# Altium PCB radxa_cm3_io_board_v1330.PcbDoc (part 6 of 8)
Units mil, origin at the board's own origin, x right, y up, seen from the top; angles counter-clockwise.
Board outline 6299.61 x 3544.09 mil, 4 copper layers (Top, GND, Power, Bottom), stack 35.4 mil thick; 547 components, 411 nets, 1952 pads, 2650 vias.
Unrouted connection lines stored in the file: 280.
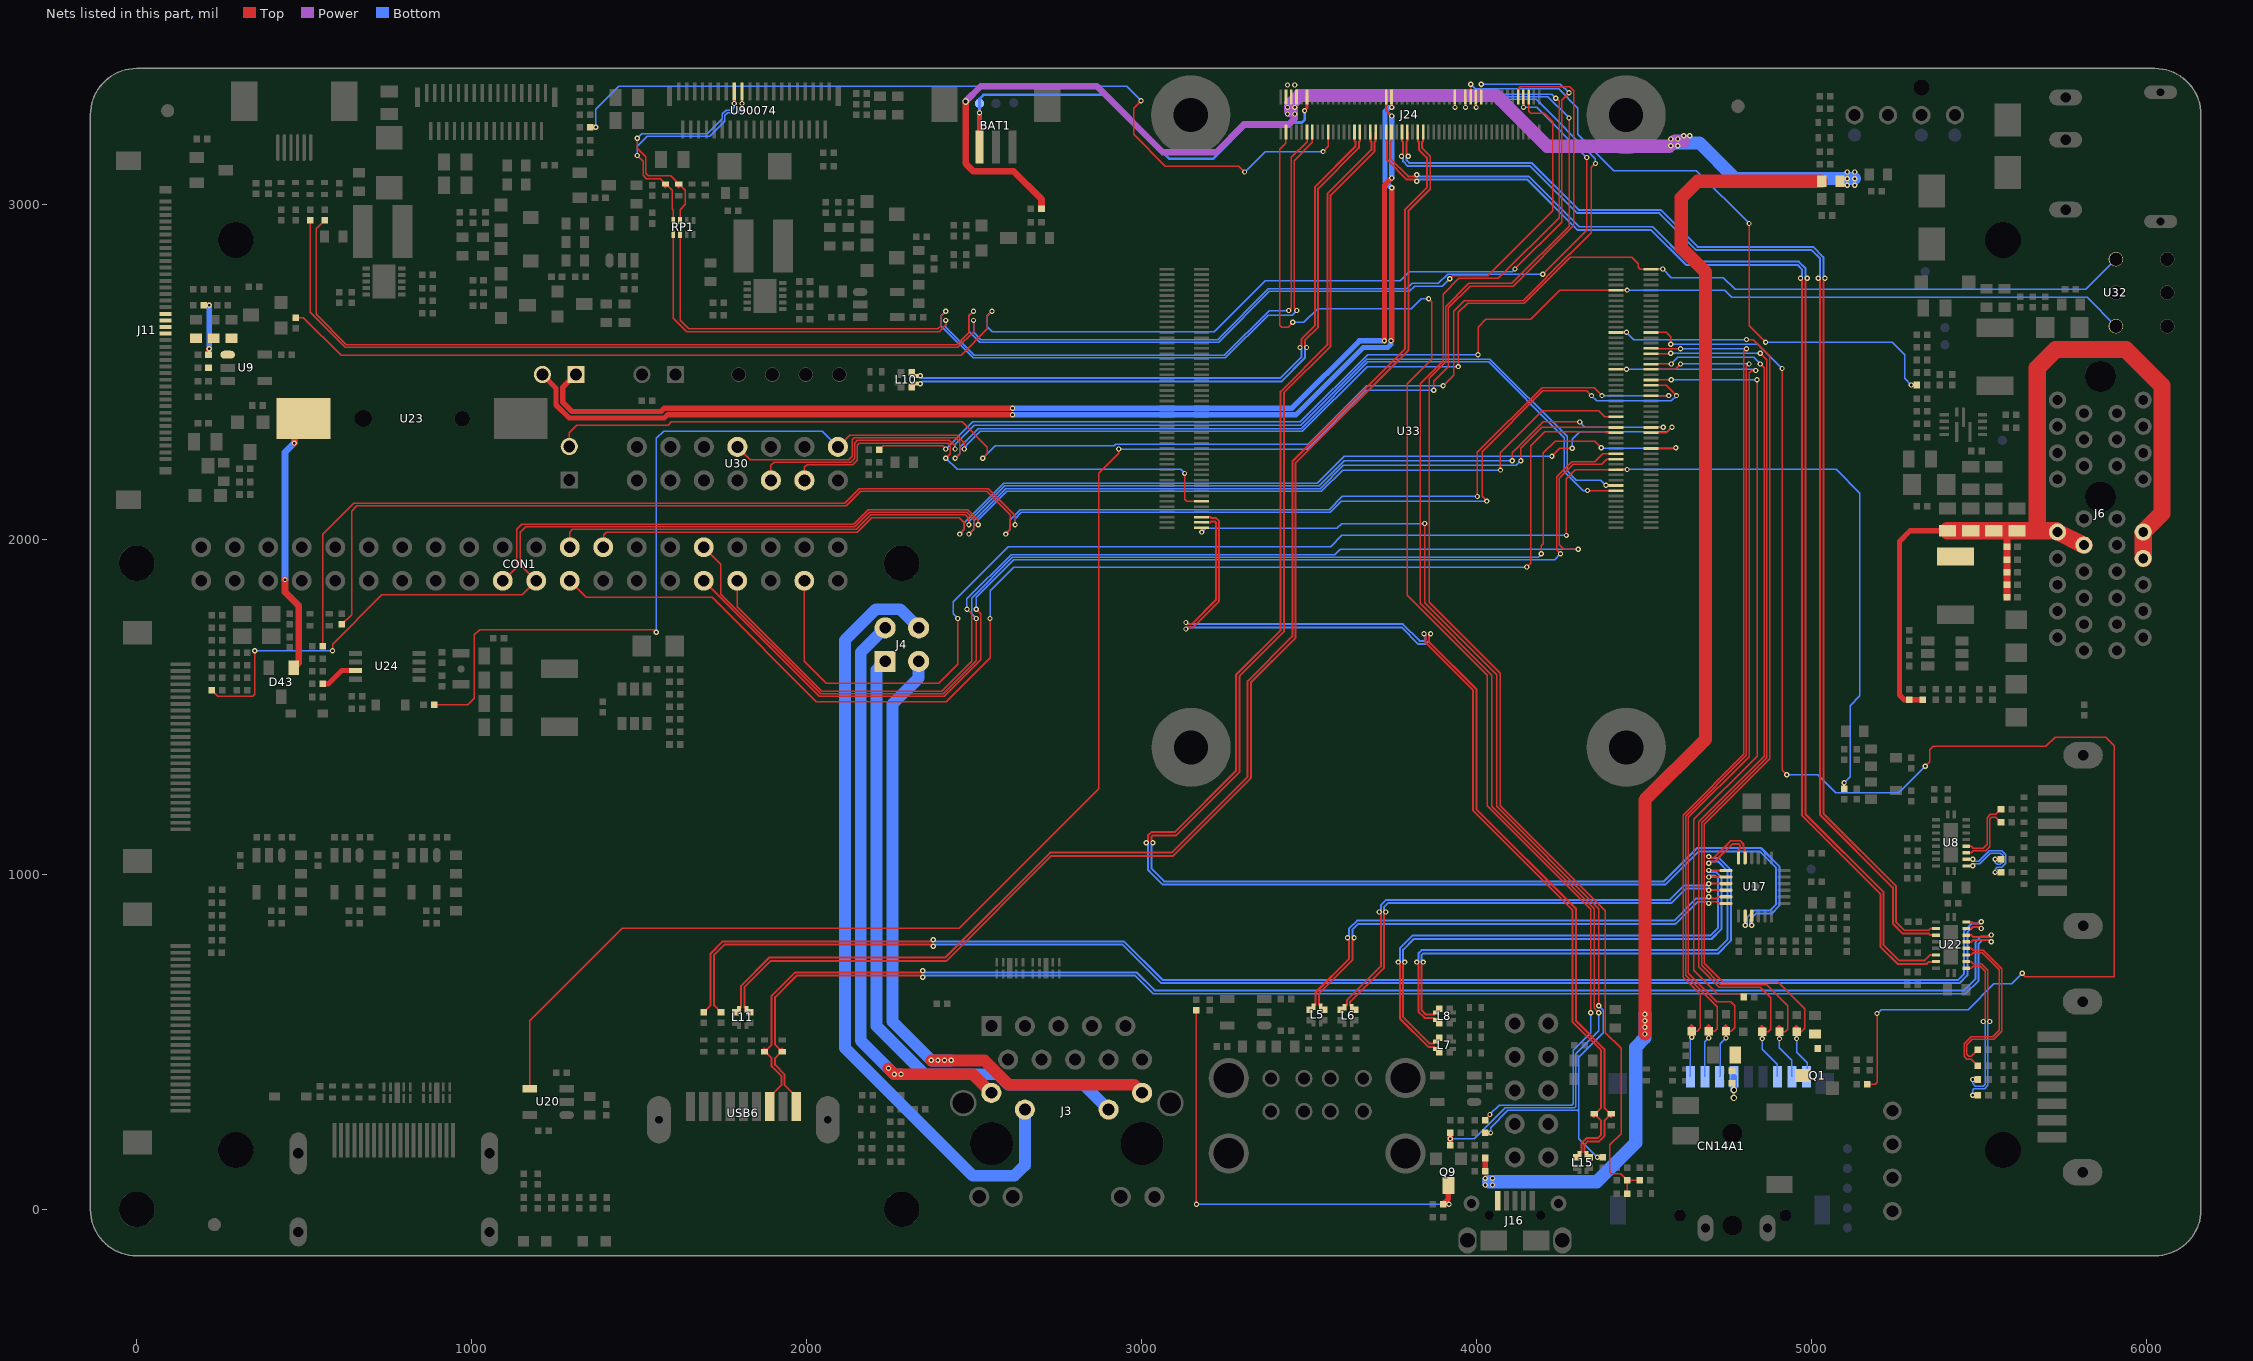
[diagram p8: the nets of this part, all layers, seen from the top]

## Via types
v1: diameter 15.75, hole 7.87, Top to Bottom, 2618 vias
v2: diameter 19.68, hole 11.81, Top to Bottom, 32 vias

## Nets (pads, with @x,y where several pads share a name; then routed paths per layer and width w, separated by ;. In a path a pad name is that pad's centre, name@x,y a point inside that pad or via, vN(x,y) a via of type N, cw(c..) or ccw(c..) an arc to the next point about the centre after c; other vN are vias at no path point) (continued)
PWM3_IR: CON1.37 R215.2 U33.24 | length 4841.3
  Top w3.94: CON1.37@1992.91,1876.38 1992.91,1635.83 2057.87,1570.87 2393.99,1570.87 2450.79,1627.66 v1(2450.79,1763.78) ; v1(4267.72,2011.81) 4267.72,2181.1 4294.69,2208.07 U33.24@4415.75,2208.07 4416.34,2208.66 v1(4448.82,2208.66) ; R215.2@5096.46,1255.91 v1(5096.46,1273.62)
  Bottom w3.94: v1(2450.79,1763.78) 2437.01,1777.56 2437.01,1814.34 2601.01,1978.35 3563.67,1978.35 3597.13,2011.81 v1(4267.72,2011.81) ; v1(4448.82,2208.66) 5072.83,2208.66 5143.7,2137.8 5143.7,1533.46 5114.17,1503.94 5114.17,1291.34 v1(5096.46,1273.62)
PWM11: CON1.32 U33.31 | length 3833.3
  Top w3.94: CON1.32@1692.91,1976.38 1744.09,1925.2 1744.09,1836.9 2041.62,1539.37 2407.04,1539.37 2505.91,1638.24 v1(2505.91,1763.78) ; v1(4192.91,1956.69) 4192.91,1980.31 4198.82,1986.22 4198.82,2257.87 4234.25,2293.31 4352.36,2293.31 v1(4372.05,2273.62) ; U33.31@4520.47,2271.06 4591.93,2271.06 v1(4594.49,2273.62)
  Bottom w3.94: v1(2505.91,1763.78) 2492.13,1777.56 2492.13,1824.92 2614.06,1946.85 4183.07,1946.85 v1(4192.91,1956.69) ; v1(4372.05,2273.62) 4374.02,2271.65 4592.52,2271.65 v1(4594.49,2273.62)
PWRON_KEY: R143.1 U30.14 U32.1 U33.99 | length 6296.6
  Top w3.94: R143.1@887.8,1505.91 988.19,1505.91 1007.87,1525.59 1007.87,1714.57 1023.62,1730.31 1543.31,1730.31 v1(1551.18,1722.44) ; U30.14@2093.31,2275.98 2128.35,2311.02 2448.26,2311.02 2470.47,2288.81 v1(2470.47,2269.68) ; v1(3944.88,2515.75) 3944.88,2677.17 3972.44,2704.72 4141.79,2704.72 4279.59,2842.52 4462.6,2842.52 4482.28,2822.83 4482.28,2812.4 4488.19,2806.5 U33.99@4520.47,2806.5 4521.06,2807.09 v1(4555.12,2807.09)
  Bottom w3.94: v1(1551.18,1722.44) 1551.18,2301.18 1572.83,2322.83 2046.46,2322.83 U30.14@2093.31,2275.98 ; v1(2470.47,2269.68) 2469.42,2270.74 2476.38,2277.7 2476.38,2280.82 2518.39,2322.83 3479.76,2322.83 3672.67,2515.75 v1(3944.88,2515.75) ; v1(4555.12,2807.09) 4580.71,2781.5 4736.22,2781.5 4771.65,2746.06 5817.72,2746.06 U32.1@5907.87,2836.22
RTC_BATTERY: D43.1 TP8.1 U23.1 | length 821.3
  Top w19.68: v1(442.91,1879.92) 442.91,1842.52 484.25,1801.18 484.25,1631.89 D43.1@468.5,1616.14 ; v1(470.47,2287.4) 470.47,2334.65 496.06,2360.24 U23.1@498.11,2360.24
  Bottom w19.68: v1(442.91,1879.92) 442.91,2259.84 v1(470.47,2287.4) TP8.1@470.47,2316.93
RTCIC_32KOUT: R138.1 U24.7 | length 114.8
  Top w15.75: R138.1@555.12,1568.9 555.23,1569.01 572.95,1569.01 612.32,1608.38 U24.7@653.53,1608.38
RUN_PG: R172.2 U32.3 U33.92 | length 3989.9
  Top w3.94: R172.2@2216.54,2267.72 2228.35,2279.53 2405.51,2279.53 v1(2415.35,2269.68) ; v1(4003.94,2551.18) 4003.94,2633.86 4027.56,2657.48 4161.42,2657.48 4247.44,2743.5 U33.92@4415.75,2743.5 4416.34,2744.09 v1(4448.82,2744.09)
  Bottom w3.94: v1(2415.35,2269.68) 2496.06,2350.39 3473.91,2350.39 3674.7,2551.18 v1(4003.94,2551.18) ; v1(4448.82,2744.09) 4740.22,2744.09 4761.87,2722.44 5821.65,2722.44 U32.3@5907.87,2636.22
SARADC_IN3: CON1.26 U33.37 | length 3537
  Top w3.94: CON1.26@1392.91,1976.38 1393.7,1976.38 1393.7,2013.78 1401.57,2021.65 2151.57,2021.65 2194.88,2064.96 2454.72,2064.96 2470.47,2049.21 2470.47,2029.53 v1(2456.69,2015.75) ; v1(4224.41,2248.03) 4248.03,2271.65 v1(4285.43,2271.65) ; U33.37@4520.47,2318.31 4566.34,2318.31 v1(4582.68,2334.65)
  Bottom w3.94: v1(2456.69,2015.75) 2470.47,2029.53 2470.47,2049.89 2587.91,2167.32 3523.62,2167.32 3604.33,2248.03 v1(4224.41,2248.03) ; v1(4285.43,2271.65) 4285.43,2299.21 4307.09,2320.87 4568.9,2320.87 v1(4582.68,2334.65)
SARADC_VIN0_KEY/RECOVERY: J22.2 J24.26 | length 4284.5
  Top w3.94: J22.2@1291.34,2277.17 1291.34,2318.9 1312.99,2340.55 1586.61,2340.55 1596.46,2350.39 2464.57,2350.39 2539.37,2275.59 2539.37,2255.91 v1(2525.59,2242.13) ; v1(3899.61,2458.66) 3931.1,2490.16 3931.1,2681.1 3962.6,2712.6 4138.53,2712.6 4276.32,2850.39 4277.56,2850.39 4342.52,2915.35 4342.52,3110.24 v1(4354.33,3122.05) ; J24.26@3997.44,3320.08 3998.03,3319.49 v1(3998.03,3289.37)
  Bottom w3.94: v1(2525.59,2242.13) 2562.99,2279.53 2918.62,2279.53 2922.56,2283.46 3496.44,2283.46 3671.63,2458.66 v1(3899.61,2458.66) ; v1(3998.03,3289.37) 3998.03,3303.15 4007.87,3312.99 4177.17,3312.99 4354.33,3135.83 v1(4354.33,3122.05)
SARADC_VIN1_HW_ID: J24.28 R153.1 | length 2007.3
  Top w3.94: J24.28@3981.69,3320.08 3981.69,3357.68 v1(3982.28,3358.27) ; v1(4812.99,2942.91) 4812.99,2637.8 v1(4862.2,2588.58) ; v1(5297.24,2460.63) R153.1@5312.99,2460.63
  Bottom w3.94: v1(3982.28,3358.27) 3996.06,3344.49 4244.09,3344.49 4301.18,3287.4 4301.18,3208.66 4409.45,3100.39 4655.51,3100.39 v1(4812.99,2942.91) ; v1(4862.2,2588.58) 5240.16,2588.58 5277.56,2551.18 5277.56,2480.31 v1(5297.24,2460.63)
SARADC_VIN2_HP_HOOK: C35.1 J24.30 R32.1 R33.2 | length 4177.7
  Top w3.94: J24.30@3965.94,3320.08 3966.54,3319.49 v1(3966.54,3289.37) ; v1(4275.59,3257.87) 4275.59,2934.31 4105.06,2763.78 3976.38,2763.78 3907.48,2694.88 3907.48,2529.53 3858.27,2480.31 3858.27,1812.99 4070.87,1600.39 4070.87,1204.72 4383.86,891.73 4383.86,527.56 4431.1,480.31 4431.1,226.38 4397.64,192.91 4397.64,110.24 4401.57,106.3 4429.13,106.3 R33.2@4448.82,86.61 ; C35.1@4448.82,47.24 R33.2@4448.82,86.61 ; R32.1@4486.22,86.61 R33.2@4448.82,86.61
  Bottom w3.94: v1(3966.54,3289.37) 3966.54,3312.99 3974.41,3320.87 4212.6,3320.87 v1(4275.59,3257.87)
SATA1_RXN: C33.1 U8.11 | length 203.4
  Top w3.94: U8.11@5461.02,1025.2 5461.42,1025.59 v1(5480.31,1025.59) ; v1(5547.24,1045.28) C33.1@5564.96,1045.28
  Bottom w3.94: v1(5480.31,1025.59) 5486.22,1031.5 5501.97,1031.5 5533.46,1062.99 5562.99,1062.99 5570.87,1055.12 5570.87,1037.4 5562.99,1029.53 5553.15,1029.53 5547.24,1035.43 v1(5547.24,1045.28)
SATA1_RXP: C34.1 U8.12 | length 230.2
  Top w3.94: U8.12@5461.02,1044.88 5461.42,1045.28 v1(5480.31,1045.28) ; v1(5547.24,1005.91) C34.1@5564.96,1005.91
  Bottom w3.94: v1(5480.31,1045.28) 5486.22,1039.37 5498.03,1039.37 5529.53,1070.87 5566.93,1070.87 5578.74,1059.06 5578.74,1033.46 5566.93,1021.65 5553.15,1021.65 5547.24,1015.75 v1(5547.24,1005.91)
SATA1_TXN: C32.1 U8.13 | length 203.1
  Top w3.94: U8.13@5461.02,1064.57 5461.42,1064.96 5476.38,1064.96 5482.28,1070.87 5519.69,1070.87 5531.5,1082.68 5531.5,1165.35 5537.4,1171.26 5549.21,1171.26 C32.1@5564.96,1155.51
SATA1_TXP: C31.1 U8.14 | length 200.8
  Top w3.94: U8.14@5461.02,1084.25 5461.42,1084.65 5476.38,1084.65 5482.28,1078.74 5511.81,1078.74 5523.62,1090.55 5523.62,1169.29 5533.46,1179.13 5549.21,1179.13 C31.1@5564.96,1194.88
SATA2_RXN: C113.1 U22.11 | length 477.8
  Top w3.94: U22.11@5461.02,720.08 5476.38,720.08 5482.28,725.98 5502.64,725.98 5517.72,710.91 5517.72,566.93 v1(5511.81,561.02) ; v1(5480.31,387.8) C113.1@5496.06,387.8
  Bottom w3.94: v1(5480.31,387.8) 5480.31,375.98 5488.19,368.11 5511.81,368.11 5517.72,374.02 5517.72,555.12 v1(5511.81,561.02)
SATA2_RXP: C114.1 U22.12 | length 506.6
  Top w3.94: U22.12@5461.02,739.76 5476.38,739.76 5482.28,733.86 5505.91,733.86 5525.59,714.17 5525.59,566.93 v1(5531.5,561.02) ; v1(5480.31,340.55) C114.1@5496.06,340.55
  Bottom w3.94: v1(5480.31,340.55) 5480.31,356.3 5484.25,360.24 5515.75,360.24 5525.59,370.08 5525.59,555.12 v1(5531.5,561.02)
SATA2_TXN: C112.1 U22.13 | length 512.8
  Top w3.94: U22.13@5461.02,759.45 5476.38,759.45 5482.28,765.35 5508.55,765.35 5559.06,714.85 5559.06,534.76 5540.05,515.75 5476.38,515.75 5454.72,494.09 5454.72,456.69 5462.6,448.82 5476.38,448.82 C112.1@5496.06,429.13
SATA2_TXP: C110.1 U22.14 | length 511.3
  Top w3.94: U22.14@5461.02,779.13 5476.38,779.13 5482.28,773.23 5511.81,773.23 5566.93,718.11 5566.93,531.5 5543.31,507.87 5479.64,507.87 5462.6,490.83 5462.6,462.6 5468.5,456.69 5476.38,456.69 C110.1@5496.06,476.38
SDMMC0_CLK: R11.1 U33.57 | length 2339.5
  Top w3.94: U33.57@4520.47,2475.79 4521.06,2476.38 v1(4580.71,2476.38) ; R11.1@4797.24,633.86 4787.4,643.7 4718.5,643.7 4647.64,714.57 4647.64,1147.64 4647.64,1164 4836.61,1352.98 v1(4836.61,2476.38)
  Bottom w3.94: v1(4580.71,2476.38) v1(4836.61,2476.38)
SDMMC0_CMD: CN14A1.3 ED13.1 U33.62 | length 2727.4
  Top w3.94: U33.62@4415.75,2507.28 4416.34,2507.87 v1(4446.85,2507.87) ; v1(4744.09,511.81) ED13.1@4744.09,532.09 4759.84,532.09 4769.69,541.93 4769.69,608.27 4757.87,620.08 4716.54,620.08 4631.89,704.72 4631.89,1155.51 4631.89,1170.53 4812.99,1351.63 4812.99,2498.03 4818.9,2503.94 v1(4832.68,2503.94)
  Bottom w3.94: v1(4446.85,2507.87) 4828.74,2507.87 v1(4832.68,2503.94) ; CN14A1.3@4724.41,395.89 4726.38,397.86 4726.38,494.09 v1(4744.09,511.81)
SDMMC0_D0: CN14A1.7 ED11.1 U33.63 | length 2756
  Top w3.94: U33.63@4520.47,2523.03 4521.06,2523.62 v1(4580.71,2523.62) ; v1(4846.46,2523.62) 4858.27,2511.81 4858.27,1352.36 4663.39,1157.48 4663.39,724.41 4724.41,663.39 4846.46,663.39 4877.95,631.89 4877.95,537.99 4870.08,530.12 ED11.1@4852.36,530.12 v1(4852.36,509.84)
  Bottom w3.94: v1(4580.71,2523.62) 4600.39,2543.31 4826.77,2543.31 v1(4846.46,2523.62) ; v1(4852.36,509.84) 4852.36,478.35 4897.64,433.07 CN14A1.7@4897.64,395.89
SDMMC0_D1: CN14A1.8 ED10.1 U33.67 | length 2797.5
  Top w3.94: U33.67@4520.47,2554.53 4578.15,2554.53 v1(4578.74,2555.12) ; v1(4846.46,2555.12) 4866.14,2535.43 4866.14,1348.43 4671.26,1153.54 4671.26,728.35 4728.35,671.26 4865.55,671.26 4928.54,608.27 4928.54,537.4 4921.26,530.12 ED10.1@4903.54,530.12 v1(4903.54,509.84)
  Bottom w3.94: v1(4578.74,2555.12) v1(4846.46,2555.12) ; v1(4903.54,509.84) 4903.54,482.28 4940.94,444.88 CN14A1.8@4940.94,395.89
SDMMC0_D2/ARMJTAG_TCK: CN14A1.1 ED15.1 U33.69 | length 2579.3
  Top w3.94: U33.69@4520.47,2570.28 4521.06,2568.9 v1(4608.27,2568.9) ; v1(4641.73,513.78) ED15.1@4641.73,532.09 4657.48,532.09 4667.03,541.63 4667.03,642.03 4616.14,692.91 4616.14,1163.39 4616.14,1177.05 4797.24,1358.15 4797.24,2561.02 v1(4805.12,2568.9)
  Bottom w3.94: v1(4608.27,2568.9) v1(4805.12,2568.9) ; CN14A1.1@4637.8,395.89 4637.79,509.84 v1(4641.73,513.78)
SDMMC0_D3/ARMJTAG_TMS: CN14A1.2 ED14.1 U33.61 | length 2570.3
  Top w3.94: U33.61@4520.47,2507.28 4591.93,2507.28 v1(4608.27,2523.62) ; v1(4692.91,511.81) ED14.1@4692.91,532.09 4710.63,532.09 4718.5,539.96 4718.5,604.33 4624.02,698.82 4624.02,1159.45 4624.02,1173.79 4805.12,1354.89 4805.12,2515.75 v1(4812.99,2523.62)
  Bottom w3.94: v1(4608.27,2523.62) v1(4812.99,2523.62) ; CN14A1.2@4681.1,395.89 4681.1,500 v1(4692.91,511.81)
SDMMC0_DET_L: CN14A1.9 ED9.1 U33.76 | length 2973.3
  Top w3.94: U33.76@4415.75,2617.52 4416.34,2618.11 v1(4446.85,2618.11) ; v1(4805.12,2596.46) 4824.8,2596.46 4874.02,2547.24 4874.02,1344.49 4679.13,1149.61 4679.13,734.25 4734.25,679.13 4899.02,679.13 4979.72,598.43 4979.72,541.34 4968.5,530.12 ED9.1@4954.72,530.12 v1(4954.72,509.84)
  Bottom w3.94: v1(4446.85,2618.11) 4468.5,2596.46 v1(4805.12,2596.46) ; v1(4954.72,509.84) 4954.72,468.5 4986.22,437.01 4986.22,397.86 CN14A1.9@4984.25,395.89
SDMMC_PWREN: R13.2 U33.75 | length 4454.9
  Top w3.94: U33.75@4520.47,2617.52 4565.55,2617.52 4578.74,2604.33 v1(4578.74,2582.68) ; v1(4911.42,2509.84) 4911.42,1311.02 v1(4925.2,1297.24) ; R13.2@5165.35,374.02 5188.98,374.02 5194.88,379.92 v1(5194.88,584.65) ; v1(5338.58,1322.83) 5352.36,1336.61 5352.36,1372.05 5362.2,1381.89 5698.82,1381.89 5726.38,1409.45 5877.95,1409.45 5903.54,1383.86 5903.54,694.88 5637.8,694.88 v1(5627.95,704.72)
  Bottom w3.94: v1(4578.74,2582.68) 4838.58,2582.68 v1(4911.42,2509.84) ; v1(4925.2,1297.24) 5017.72,1297.24 5070.87,1244.09 5259.84,1244.09 v1(5338.58,1322.83) ; v1(5194.88,584.65) 5206.69,596.46 5466.54,596.46 5543.31,673.23 5596.46,673.23 v1(5627.95,704.72)
SPI0_CSO_MO: CON1.33 U33.28 | length 3450.6
  Top w3.94: CON1.33@1792.91,1876.38 1792.91,1799.21 2044.88,1547.24 2403.78,1547.24 2492.13,1635.59 2492.13,1777.56 v1(2478.35,1791.34) ; v1(4303.15,1970.47) 4259.84,1970.47 4246.06,1984.25 4246.06,2183.07 4287.4,2224.41 4372.64,2224.41 4387.8,2239.57 U33.28@4415.75,2239.57
  Bottom w3.94: v1(2478.35,1791.34) 2478.35,1822.27 2610.8,1954.72 3576.77,1954.72 3592.52,1970.47 v1(4303.15,1970.47)
SPI0_MISO_MO: CON1.31 U33.30 | length 3446
  Top w3.94: CON1.31@1692.91,1876.38 2037.8,1531.5 2410.3,1531.5 2519.69,1640.88 2519.69,1777.56 v1(2505.91,1791.34) ; v1(4250,1956.69) 4238.19,1968.5 4238.19,2187.01 4283.46,2232.28 4352.36,2232.28 4375.39,2255.31 U33.30@4415.75,2255.31
  Bottom w3.94: v1(2505.91,1791.34) 2505.91,1827.56 2617.32,1938.98 4232.28,1938.98 v1(4250,1956.69)
SPI3_CLK_M0: CON1.23 U33.38 | length 3929.4
  Top w3.94: CON1.23@1292.91,1876.38 1342.52,1826.77 1717.71,1826.77 2028.74,1515.75 2416.82,1515.75 2547.24,1646.17 v1(2547.24,1763.78) ; v1(4149.61,1917.32) 4161.42,1929.13 4161.42,2279.53 4202.76,2320.87 4383.27,2320.87 4385.83,2318.31 U33.38@4415.75,2318.31
  Bottom w3.94: v1(2547.24,1763.78) 2547.24,1846.63 2617.94,1917.32 v1(4149.61,1917.32)
SPI3_CSO_M0: CON1.24 U33.39 | length 3543.9
  Top w3.94: CON1.24@1292.91,1976.38 1292.91,2021.65 1300.79,2029.53 2147.64,2029.53 2190.94,2072.83 2473.79,2072.83 2484.25,2062.37 v1(2484.25,2043.31) ; v1(4106.3,2234.25) 4106.3,2257.87 4198.82,2350.39 v1(4307.09,2350.39) ; U33.39@4520.47,2334.06 4521.06,2334.65 v1(4557.09,2334.65)
  Bottom w3.94: v1(2484.25,2043.31) 2484.25,2052.53 2591.17,2159.45 3529.53,2159.45 3604.33,2234.25 v1(4106.3,2234.25) ; v1(4307.09,2350.39) 4322.83,2334.65 v1(4557.09,2334.65)
SPI3_MISO_M0: CON1.21 R79.2 U33.40 | length 4906.7
  Top w3.94: R79.2@224.41,1549.21 242.13,1531.5 346.46,1531.5 352.36,1537.4 v1(352.36,1667.32) ; v1(584.65,1667.32) 584.65,1687.01 732.28,1834.65 1151.18,1834.65 CON1.21@1192.91,1876.38 1145.67,1923.62 1145.67,2021.65 1161.42,2037.4 2143.47,2037.4 2186.78,2080.71 2477.05,2080.71 2498.03,2059.73 2498.03,2029.53 v1(2484.25,2015.75) ; v1(4131.89,2234.25) 4131.89,2271.65 4194.29,2334.06 U33.40@4415.75,2334.06
  Bottom w3.94: v1(352.36,1667.32) v1(584.65,1667.32) ; v1(2484.25,2015.75) 2498.03,2029.53 2498.03,2055.18 2594.43,2151.57 3533.08,2151.57 3601.98,2220.47 4118.11,2220.47 v1(4131.89,2234.25)
SPI3_MOSI_M0: CON1.19 U33.44 | length 3690.8
  Top w3.94: CON1.19@1092.91,1876.38 1133.86,1917.32 1133.86,2029.53 1149.61,2045.28 2140.21,2045.28 2183.51,2088.58 2480.31,2088.58 2511.81,2057.09 v1(2511.81,2043.31) ; v1(4070.87,2206.69) 4070.87,2257.87 4076.77,2263.78 4076.77,2264.4 4196.23,2383.86 4363.58,2383.86 4381.89,2365.55 U33.44@4415.75,2365.55
  Bottom w3.94: v1(2511.81,2043.31) 2511.81,2057.82 2597.69,2143.7 3536.34,2143.7 3599.33,2206.69 v1(4070.87,2206.69)
SPKN_OUT: J9.2 J24.58 | length 3467.8
  Top w7.87: J24.58@3745.47,3320.08 3746.06,3319.49 v1(3746.06,3289.37)
  Top w15.75: J9.2@1211.02,2492.13 1251.97,2451.18 1251.97,2401.57 1291.34,2362.2 1574.8,2362.2 1584.65,2372.05 v1(2614.17,2372.05) ; v1(3744.09,2592.52) 3746.06,2592.52 v1(3746.06,3049.21)
  Bottom w15.75: v1(2614.17,2372.05) 3460.63,2372.05 3661.42,2572.83 3734.25,2572.83 3744.09,2582.68 v1(3744.09,2592.52) ; v1(3746.06,3049.21) 3726.38,3068.9 3726.38,3277.56 3738.19,3289.37 v1(3746.06,3289.37)
SPKP_OUT: J9.1 J24.60 | length 3393.9
  Top w7.87: J24.60@3729.72,3320.08 3729.72,3279.53 3730.31,3279.53 v1(3746.06,3263.78)
  Top w15.75: J9.1@1311.02,2492.13 1271.65,2452.76 1271.65,2409.73 1299.49,2381.89 1564.96,2381.89 1574.8,2391.73 v1(2614.17,2391.73) ; v1(3724.41,2592.52) 3724.41,3057.09 v1(3746.06,3078.74)
  Bottom w15.75: v1(2614.17,2391.73) 3448.82,2391.73 3649.61,2592.52 v1(3724.41,2592.52) ; v1(3746.06,3078.74) v1(3746.06,3263.78)
SYNC_IN: U30.8 U33.16 | length 3116.6
  Top w3.94: U30.8@1793.31,2275.98 1831.1,2238.19 2125.98,2238.19 2135.83,2248.03 2135.83,2297.24 2141.73,2303.15 2445,2303.15 2456.69,2291.45 2456.69,2255.91 v1(2442.91,2242.13) ; v1(4330.71,2145.67) 4415.16,2145.67 U33.16@4415.75,2145.08
  Bottom w3.94: v1(2442.91,2242.13) 2456.69,2255.91 2456.69,2275.39 2512.01,2330.71 3476.49,2330.71 3675.31,2529.53 4035.38,2529.53 4261.81,2303.09 4261.81,2201.66 4317.8,2145.67 v1(4330.71,2145.67)
SYNC_OUT: U30.9 U33.18 | length 2974.4
  Top w3.94: U30.9@1893.31,2175.98 1893.31,2220.47 1903.15,2230.31 2131.89,2230.31 2143.7,2242.13 2143.7,2287.4 2151.57,2295.28 2425.2,2295.28 2442.91,2277.56 v1(2442.91,2269.68) ; v1(4385.83,2161.42) 4415.16,2161.42 U33.18@4415.75,2160.83
  Bottom w3.94: v1(2442.91,2269.68) 2442.91,2283.46 2500,2340.55 3475.2,2340.55 3672.05,2537.4 4039.37,2537.4 4269.69,2307.09 4269.69,2204.92 4297.44,2177.17 4370.08,2177.17 v1(4385.83,2161.42)
TP_DET_1: J24.81 R66.1 | length 2554.3
  Top w3.94: R66.1@1354.33,3230.31 v1(1370.08,3230.31) ; v1(2998.03,3309.06) 2976.38,3287.4 2976.38,3208.66 3070.87,3114.17 3289.37,3114.17 v1(3307.09,3096.46) ; v1(3541.34,3157.48) 3556.5,3172.64 J24.81@3556.5,3216.14
  Bottom w3.94: v1(1370.08,3230.31) 1370.08,3283.46 1438.98,3352.36 2954.72,3352.36 v1(2998.03,3309.06) ; v1(3307.09,3096.46) 3368.11,3157.48 v1(3541.34,3157.48)
TP_INT_1: J24.87 RP1.7 | length 2868.8
  Top w3.94: RP1.7@1621.89,2910.6 1621.89,2653.7 1647.64,2627.95 2391.79,2627.95 2401.57,2637.74 2401.57,2667.32 v1(2415.35,2681.1) ; v1(3462.6,2683.07) 3454.72,2690.94 3454.72,3130.51 3509.25,3185.04 J24.87@3509.25,3216.14
  Bottom w3.94: v1(2415.35,2681.1) 2401.57,2667.32 2401.57,2636.44 2496.68,2541.34 3249.38,2541.34 3377.34,2669.29 3448.82,2669.29 v1(3462.6,2683.07)
TP_INT_L: J24.8 R46.1 | length 4861.2
  Top w3.94: R46.1@517.72,2952.76 517.72,2677.17 622.05,2572.83 2450.9,2572.83 2498.03,2619.96 v1(2498.03,2653.54) ; J24.8@4139.17,3320.08 4139.76,3319.49 v1(4139.76,3289.37) ; v1(4196.85,2791.34) 4328.74,2923.23 v1(4328.74,3139.76)
  Bottom w3.94: v1(2498.03,2653.54) 2498.03,2617.94 2519.51,2596.46 3226.55,2596.46 3378.13,2748.03 3791.34,2748.03 3807.09,2763.78 3885.83,2763.78 3913.39,2791.34 v1(4196.85,2791.34) ; v1(4139.76,3289.37) 4179.13,3289.37 v1(4328.74,3139.76)
TP_INT_LCD: D15.1 RP1.2 U90074.25 | length 733.6
  Top w3.94: v1(1494.09,3196.85) 1494.09,3167.32 1519.69,3141.73 1519.69,3092.52 1527.56,3084.65 1594.49,3084.65 D15.1@1618.11,3061.02 1637.8,3041.34 1637.8,3000 1622.05,2984.25 1622.05,2951.76 RP1.2@1621.89,2951.6 ; v1(1783.46,3301.18) U90074.25@1783.46,3336.61
  Bottom w3.94: v1(1494.09,3196.85) 1507.87,3210.63 1702.76,3210.63 1748.03,3255.91 1748.03,3269.68 1759.84,3281.5 1775.59,3281.5 1783.46,3289.37 v1(1783.46,3301.18)
TP_PWR_DET: J24.24 R51.2 | length 4816.4
  Top w3.94: R51.2@474.41,2661.42 498.03,2661.42 610.24,2549.21 2460.69,2549.21 2539.37,2627.89 2539.37,2667.32 v1(2553.15,2681.1) ; J24.24@4013.19,3320.08 4013.19,3357.68 v1(4013.78,3358.27) ; v1(4114.17,2807.09) 4253.94,2946.85 4253.94,3311.02 v1(4275.59,3332.68)
  Bottom w3.94: v1(2553.15,2681.1) 2539.37,2667.32 2539.37,2635.15 2554.44,2620.08 3216.77,2620.08 3368.34,2771.65 3771.65,2771.65 3799.21,2799.21 4106.3,2799.21 v1(4114.17,2807.09) ; v1(4013.78,3358.27) 4250,3358.27 v1(4275.59,3332.68)
TP_RST_1: J24.89 RP1.8 | length 2791.7
  Top w3.94: RP1.8@1601.89,2910.6 1601.89,2659.92 1641.73,2620.08 2395.05,2620.08 2415.35,2640.38 v1(2415.35,2653.54) ; v1(3438.98,2683.07) 3446.85,2690.94 3446.85,3140.35 3493.5,3187.01 J24.89@3493.5,3216.14
  Bottom w3.94: v1(2415.35,2653.54) 2415.35,2633.8 2499.94,2549.21 3246.12,2549.21 3379.98,2683.07 v1(3438.98,2683.07)
TP_RST_L: J24.6 R45.1 | length 4739.7
  Top w3.94: R45.1@561.02,2952.76 535.43,2927.17 535.43,2671.26 625.98,2580.71 2447.64,2580.71 2484.25,2617.32 2484.25,2667.32 v1(2498.03,2681.1) ; v1(3919.29,2777.56) 3929.13,2787.4 4033.41,2787.4 4226.38,2980.37 4226.38,3246.74 4201.46,3271.65 4161.42,3271.65 4154.92,3278.15 J24.6@4154.92,3320.08
  Bottom w3.94: v1(2498.03,2681.1) 2484.25,2667.32 2484.25,2620.58 2516.25,2588.58 3229.81,2588.58 3381.39,2740.16 3799.21,2740.16 3814.96,2755.91 3897.64,2755.91 v1(3919.29,2777.56)
TP_RST_LCD: D16.1 RP1.1 U90074.23 | length 710.8
  Top w3.94: v1(1494.09,3145.67) 1511.81,3127.95 1511.81,3086.61 1521.65,3076.77 1562.99,3076.77 D16.1@1578.74,3061.02 1598.43,3041.34 1598.43,2986.22 1602.36,2982.28 1602.36,2952.07 RP1.1@1601.89,2951.6 ; v1(1807.09,3301.18) U90074.23@1807.09,3336.61
  Bottom w3.94: v1(1494.09,3145.67) 1494.09,3173.23 1523.62,3202.76 1710.63,3202.76 1755.91,3248.03 1755.91,3265.75 1763.78,3273.62 1793.31,3273.62 1807.09,3287.4 v1(1807.09,3301.18)
TR0: J3.11 J4.2 | length 1761.1
  Top w35.43: v1(2244.09,421.26) v1(2261.81,403.54) 2495.67,403.54 J3.11@2551.18,348.03
  Bottom w35.43: J4.2@2234.25,1735.83 2161.42,1662.99 2161.42,503.94 v1(2244.09,421.26) v1(2261.81,403.54) v1(2281.5,403.54)
TR1: J3.12 J4.1 | length 2372.5
  Bottom w35.43: J4.1@2334.25,1735.83 2278.74,1791.34 2206.69,1791.34 2114.17,1698.82 2114.17,482.28 2496.06,100.39 2620.08,100.39 2651.18,131.5 J3.12@2651.18,298.03
TR2: J3.13 J4.4 | length 1894.9
  Bottom w35.43: J4.4@2234.25,1635.83 2208.66,1610.24 2208.66,547.24 2352.36,403.54 2570.28,403.54 2601.77,372.05 2827.17,372.05 J3.13@2901.18,298.03
TR3: J3.14 J4.3 | length 1999.8
  Top w35.43: v1(2372.05,444.88) v1(2391.73,444.88) v1(2411.42,444.88) v1(2431.1,444.88) 2530.49,444.88 2603.33,372.05 2977.17,372.05 J3.14@3001.18,348.03
  Bottom w35.43: J4.3@2334.25,1635.83 2334.25,1586.22 2255.91,1507.87 2255.91,561.02 v1(2372.05,444.88) v1(2411.42,444.88) v1(2431.1,444.88)
TS: BAT1.3 J24.90 P2.1 | length 1317.4
  Top w7.87: v1(3486.22,3279.53) 3486.22,3280.12 3493.5,3287.4 J24.90@3493.5,3320.08
  Top w15.75: BAT1.3@2515.75,3171.26 v1(2515.75,3273.62)
  Bottom w7.87: v1(2515.75,3273.62) P2.1@2515.75,3301.18 2515.75,3314.96 2527.56,3326.77 2891.73,3326.77 3082.68,3135.83 3212.6,3135.83 3320.87,3244.09 3478.35,3244.09 3486.22,3251.97 v1(3486.22,3279.53)
TV_OUT: U30.11 U33.111 | length 1439.9
  Top w3.94: U30.11@1993.31,2175.98 1993.31,2214.57 2001.18,2222.44 2137.8,2222.44 2151.57,2236.22 2151.57,2281.5 2157.48,2287.4 2421.94,2287.4 2429.13,2280.2 2429.13,2255.91 v1(2415.35,2242.13) ; v1(3127.95,2196.85) 3127.95,2120.08 3134.45,2113.58 U33.111@3179.13,2113.58
  Bottom w3.94: v1(2415.35,2242.13) 2448.82,2208.66 3116.14,2208.66 v1(3127.95,2196.85)
UART2_RX: R168.2 U33.51 | length 4750.7
  Top w3.94: R168.2@612.2,1746.06 641.73,1775.59 641.73,2084.65 657.48,2100.39 2117.38,2100.39 2160.68,2143.7 2538.14,2143.7 2608.27,2073.57 2608.27,2029.53 v1(2594.49,2015.75) ; v1(4001.97,2127.95) 4001.97,2259.84 4194.88,2452.76 4350.39,2452.76 v1(4374.02,2429.13) ; U33.51@4520.47,2428.54 4521.06,2429.13 v1(4572.83,2429.13)
  Bottom w3.94: v1(2594.49,2015.75) 2608.27,2029.53 2608.27,2059.11 2637.74,2088.58 3559.17,2088.58 3598.54,2127.95 v1(4001.97,2127.95) ; v1(4374.02,2429.13) v1(4572.83,2429.13)
UART2_TX: R167.2 U33.55 | length 4883.1
  Top w3.94: R167.2@555.12,1681.1 555.12,2015.75 647.64,2108.27 2114.12,2108.27 2157.42,2151.57 2541.4,2151.57 2622.05,2070.92 v1(2622.05,2043.31) ; v1(4029.53,2114.17) 4015.75,2127.95 4015.75,2261.81 4196.85,2442.91 4328.74,2442.91 v1(4342.52,2429.13) ; U33.55@4520.47,2460.04 4565.55,2460.04 v1(4596.46,2429.13)
  Bottom w3.94: v1(2622.05,2043.31) 2622.05,2061.76 2641,2080.71 3562.43,2080.71 3595.9,2114.17 v1(4029.53,2114.17) ; v1(4342.52,2429.13) 4358.27,2413.39 4580.71,2413.39 v1(4596.46,2429.13)
USB1_DM: L5.4 R111.1 U17.11 | length 1463.8
  Top w3.94: R111.1@3501.97,596.46 3510.83,605.32 L5.4@3512.79,605.32
  Top w5.91: L5.4@3512.79,605.32 3518.7,611.23 3518.7,647.42 3619.09,747.82 3619.09,806.1 v1(3614.17,811.02) ; v1(4692.91,933.07) 4698.82,928.15 4715.55,928.15 4720.47,933.07 U17.11@4744.09,933.07
  Bottom w5.91: v1(3614.17,811.02) 3619.09,815.94 3619.09,838.58 3642.72,862.2 4589.5,862.2 4655.44,928.15 4687.99,928.15 v1(4692.91,933.07)
USB1_DP: L5.2 R109.1 U17.12 | length 1447.5
  Top w3.94: L5.2@3534.45,605.32 3536.41,605.32 R109.1@3545.28,596.46
  Top w5.91: L5.2@3534.45,605.32 3528.54,611.23 3528.54,643.35 3628.94,743.74 3628.94,806.1 v1(3633.86,811.02) ; v1(4692.91,913.39) 4698.82,918.31 4715.55,918.31 4720.47,913.39 U17.12@4744.09,913.39
  Bottom w5.91: v1(3633.86,811.02) 3628.94,815.94 3628.94,834.51 3646.79,852.36 4593.57,852.36 4659.52,918.31 4687.99,918.31 v1(4692.91,913.39)
USB2.0_HUB_PWR: J24.34 R107.2 R108.1 | length 4327.8
  Top w3.94: J24.34@3934.45,3320.08 3934.45,3288.78 v1(3935.04,3289.37) ; v1(4236.22,3316.93) 4246.06,3307.09 4246.06,2960.63 4064.96,2779.53 3946.85,2779.53 3899.61,2732.28 3899.61,2533.46 3830.71,2464.57 3830.71,1809.06 4045.28,1594.49 4045.28,1202.76 4350.39,897.64 4350.39,600.39 v1(4364.17,586.61)
  Top w15.75: R107.2@3921.26,190.94 v1(3921.26,210.63) R108.1@3921.26,228.35
  Bottom w3.94: v1(3921.26,210.63) 3992.13,210.63 4084.65,303.15 4291.34,303.15 4295.28,307.09 4295.28,464.57 4364.17,533.46 v1(4364.17,586.61) ; v1(3935.04,3289.37) 3935.04,3318.9 3944.88,3328.74 4224.41,3328.74 v1(4236.22,3316.93)
USB2_DM: L6.4 R112.1 U17.9 | length 1424.2
  Top w3.94: R112.1@3594.49,596.46 3601.38,603.35 L6.4@3605.31,603.35
  Top w5.91: L6.4@3605.31,603.35 3612.2,610.24 3612.2,624.02 3713.58,725.39 3713.58,882.87 v1(3708.66,887.8) ; v1(4692.91,972.44) U17.9@4744.09,972.44
  Bottom w5.91: v1(3708.66,887.8) 3713.58,892.72 3713.58,907.48 3730.31,924.21 4576.7,924.21 4620.01,967.52 4687.99,967.52 v1(4692.91,972.44)
USB2_DP: L6.2 R110.1 U17.10 | length 1407
  Top w3.94: L6.2@3626.97,603.35 3633.87,596.46 R110.1@3637.8,596.46
  Top w5.91: L6.2@3626.97,603.35 3622.05,608.27 3622.05,619.94 3723.43,721.32 3723.43,882.87 v1(3728.35,887.8) ; v1(4692.91,952.76) U17.10@4744.09,952.76
  Bottom w5.91: v1(3728.35,887.8) 3723.43,892.72 3723.43,903.4 3734.39,914.37 4580.78,914.37 4624.09,957.68 4687.99,957.68 v1(4692.91,952.76)
USB2_HOST2_DM: J24.65 U17.14 | length 4744.4
  Top w5.91: v1(3013.78,1094.49) 3018.7,1099.41 3018.7,1116.14 3028.54,1125.98 3098.43,1125.98 3281.5,1309.06 3281.5,1595.47 3414.37,1728.35 3414.37,2441.01 3554.13,2580.78 3554.13,3031.57 3685.43,3162.87 3685.43,3186.02 3682.48,3188.98 J24.65@3682.48,3216.14 ; v1(4801.18,848.43) U17.14@4801.18,875.98
  Bottom w5.91: v1(3013.78,1094.49) 3018.7,1089.57 3018.7,1013.71 3031.43,1000.98 3062.92,969.49 4563.06,969.49 4662.47,1068.9 4844.35,1068.9 4893.7,1019.55 4893.7,910.57 4875.84,892.72 4828.74,892.72 4806.1,870.08 4806.1,853.35 v1(4801.18,848.43)
USB2_HOST2_DP: J24.63 U17.15 | length 4744.4
  Top w5.91: v1(3033.46,1094.49) 3028.54,1099.41 3028.54,1112.06 3032.62,1116.14 3102.5,1116.14 3291.34,1304.98 3291.34,1591.4 3424.21,1724.27 3424.21,2436.94 3563.98,2576.7 3563.98,3027.49 3695.28,3158.79 3695.28,3186.02 3698.23,3188.98 J24.63@3698.23,3216.14 ; v1(4820.87,848.43) U17.15@4820.87,875.98
  Bottom w5.91: v1(3033.46,1094.49) 3028.54,1089.57 3028.54,1017.79 3067,979.33 4558.99,979.33 4658.39,1078.74 4848.43,1078.74 4903.54,1023.62 4903.54,906.5 4879.92,882.87 4832.82,882.87 4815.94,866 4815.94,853.35 v1(4820.87,848.43)
USB2_HOST3_DM: J24.71 L10.4 R126.1 | length 1942.5
  Top w5.91: R126.1@2312.99,2498.03 2321.85,2489.17 L10.4@2321.85,2487.21 2322.84,2488.19 v1(2338.58,2488.19) ; v1(3472.44,2572.83) 3477.36,2577.76 3477.36,2598.43 3516.73,2637.8 3516.73,3051.25 3638.19,3172.71 3638.19,3186.02 3635.24,3188.98 J24.71@3635.24,3216.14
  Bottom w5.91: v1(2338.58,2488.19) 2345.47,2481.3 3413.25,2481.3 3477.36,2545.42 3477.36,2567.91 v1(3472.44,2572.83)
USB2_HOST3_DP: J24.69 L10.2 R124.1 | length 1958.8
  Top w5.91: R124.1@2312.99,2454.72 2312.99,2456.69 L10.2@2321.85,2465.55 2337.6,2465.55 v1(2338.58,2464.57) ; v1(3492.13,2572.83) 3487.2,2577.76 3487.2,2594.35 3526.57,2633.72 3526.57,3047.17 3648.03,3168.63 3648.03,3186.02 3650.98,3188.98 J24.69@3650.98,3216.14
  Bottom w5.91: v1(2338.58,2464.57) 2345.47,2471.46 3417.32,2471.46 3487.2,2541.34 3487.2,2567.91 v1(3492.13,2572.83)
USB3_DM: L7.2 R116.1 U17.7 | length 1580.7
  Top w3.94: L7.2@3878.93,500.99 3877.95,501.97 R116.1@3887.8,511.81
  Top w5.91: v1(3785.43,738.19) 3780.51,733.27 3780.51,573.96 3859.39,495.08 3871.06,495.08 L7.2@3877.95,501.97 ; v1(4692.91,1011.81) U17.7@4744.09,1011.81
  Bottom w5.91: v1(3785.43,738.19) 3780.51,743.11 3780.51,775.45 3812.15,807.09 4700.79,807.09 4730.31,836.61 4730.31,991.14 4714.57,1006.89 4697.83,1006.89 v1(4692.91,1011.81)
USB3_DP: L7.4 R121.1 U17.8 | length 1580.4
  Top w3.94: L7.4@3878.93,479.33 3887.8,470.47 R121.1@3887.8,468.5
  Top w5.91: v1(3765.75,738.19) 3770.67,733.27 3770.67,569.88 3855.31,485.24 3873.02,485.24 L7.4@3878.93,479.33 ; v1(4692.91,992.13) U17.8@4744.09,992.13
  Bottom w5.91: v1(3765.75,738.19) 3770.67,743.11 3770.67,779.53 3808.07,816.93 4696.71,816.93 4720.47,840.69 4720.47,987.06 4710.49,997.05 4697.83,997.05 v1(4692.91,992.13)
USB3_HOST1_DM: J24.47 L11.1 R128.2 | length 4014.9
  Top w3.94: R128.2@1787.4,588.58 1789.36,588.58 L11.1@1798.23,597.44
  Top w5.91: L11.1@1798.23,597.44 1804.13,603.35 1804.13,667.32 1888.78,751.97 2413.39,751.97 2726.38,1064.96 3089.43,1064.96 3315.94,1291.48 3315.94,1576.77 3449.8,1710.63 3449.8,2232.42 3786.42,2569.04 3786.42,2984.94 3851.38,3049.9 3851.38,3139.17 3827.17,3163.39 3827.17,3186.02 3824.21,3188.98 J24.47@3824.21,3216.14
USB3_HOST1_DP: J24.45 L11.3 R129.2 | length 4015.7
  Top w3.94: L11.3@1819.89,597.44 1820.87,598.43 R129.2@1830.71,588.58
  Top w5.91: L11.3@1819.89,597.44 1813.98,603.35 1813.98,663.25 1892.86,742.13 2417.46,742.13 2730.45,1055.12 3093.5,1055.12 3325.79,1287.4 3325.79,1572.69 3459.65,1706.55 3459.65,2228.35 3796.26,2564.96 3796.26,2980.86 3861.22,3045.82 3861.22,3143.25 3837.01,3167.46 3837.01,3186.02 3839.96,3188.98 J24.45@3839.96,3216.14
USB3_HOST1_SSRXN: J24.59 U22.7 | length 3775
  Top w5.91: J24.59@3729.72,3216.14 3729.72,3188.98 3732.68,3186.02 3732.68,3132.41 3791.27,3073.82 3815.94,3073.82 v1(3820.87,3068.9) ; v1(4966.54,2779.53) 4971.46,2774.61 4971.46,1175.2 5204.72,941.93 5204.72,784.45 5256.73,732.44 5342.52,732.44 5348.27,738.19 5368.9,738.19 U22.7@5370.47,739.76
  Bottom w5.91: v1(3820.87,3068.9) 3825.79,3073.82 4151.57,3073.82 4302.17,2923.23 4520.67,2923.23 4625,2818.9 4957.54,2818.9 4971.46,2804.98 4971.46,2784.45 v1(4966.54,2779.53)
USB3_HOST1_SSRXP: J24.57 U22.6 | length 3762.1
  Top w5.91: J24.57@3745.47,3216.14 3745.47,3188.98 3742.52,3186.02 3742.52,3136.49 3795.35,3083.66 3815.94,3083.66 v1(3820.87,3088.58) ; v1(4986.22,2779.53) 4981.3,2774.61 4981.3,1179.27 5214.57,946.01 5214.57,788.53 5260.05,743.05 5337.93,743.05 5354.33,759.45 U22.6@5370.47,759.45
  Bottom w5.91: v1(3820.87,3088.58) 3825.79,3083.66 4155.65,3083.66 4306.24,2933.07 4524.75,2933.07 4629.08,2828.74 4961.61,2828.74 4981.3,2809.06 4981.3,2784.45 v1(4986.22,2779.53)
USB3_HOST1_SSTXN: J24.53 U22.3 | length 3679.6
  Top w5.91: v1(3775.59,3143.7) 3780.22,3148.33 3780.22,3185.73 3776.97,3188.98 J24.53@3776.97,3216.14 ; v1(5019.69,2779.53) 5024.61,2774.61 5024.61,1177.71 5242.13,960.19 5242.13,853.35 5272.05,823.43 5349.41,823.43 5354.33,818.5 U22.3@5370.47,818.5
  Bottom w5.91: v1(3775.59,3143.7) 3780.51,3138.78 3780.51,3127.95 3794.29,3114.17 4159.45,3114.17 4300.2,2973.43 4545.21,2973.43 4655.44,2863.19 4999.93,2863.19 5024.61,2838.51 5024.61,2784.45 v1(5019.69,2779.53)
USB3_HOST1_SSTXP: J24.51 U22.2 | length 3663.3
  Top w5.91: J24.51@3792.72,3216.14 3792.72,3188.39 3790.06,3185.73 3790.06,3148.92 v1(3795.28,3143.7) ; v1(5039.37,2779.53) 5034.45,2774.61 5034.45,1181.79 5251.97,964.27 5251.97,857.42 5276.12,833.27 5349.41,833.27 5354.33,838.19 U22.2@5370.47,838.19
  Bottom w5.91: v1(3795.28,3143.7) 3790.35,3138.78 3790.35,3132.03 3798.37,3124.02 4163.53,3124.02 4304.27,2983.27 4549.28,2983.27 4659.52,2873.03 5004.01,2873.03 5034.45,2842.59 5034.45,2784.45 v1(5039.37,2779.53)
USB3_SSRXN: D35.2 U22.15 USB6.5 | length 4266.1
  Top w5.91: USB6.5@1968.5,307.09 1968.5,336.61 1934.06,371.06 1934.06,402.56 1905.51,431.1 1905.51,451.77 1918.43,464.69 D35.2@1927.17,470.47 1905.51,492.13 1905.51,633.72 1969.63,697.83 2341.54,697.83 v1(2346.46,692.91) ; U22.15@5461.02,798.82 5476.38,798.82 5481.3,803.74 5530.91,803.74 v1(5535.43,799.21)
  Bottom w5.91: v1(2346.46,692.91) 2351.38,697.83 2980.31,697.83 3034.45,643.7 5458.66,643.7 5498.03,683.07 5498.03,793.31 5508.86,804.13 5530.51,804.13 v1(5535.43,799.21)
USB3_SSRXP: D34.2 U22.16 USB6.6 | length 4282.7
  Top w5.91: USB6.6@1889.76,307.09 1889.76,336.61 1924.21,371.06 1924.21,398.48 1895.67,427.03 1895.67,451.77 1882.75,464.69 D34.2@1874.02,470.47 1895.67,492.13 1895.67,637.8 1965.55,707.68 2341.54,707.68 v1(2346.46,712.6) ; U22.16@5461.02,818.5 5476.38,818.5 5481.3,813.58 5530.12,813.58 v1(5535.43,818.9)
  Bottom w5.91: v1(2346.46,712.6) 2351.38,707.68 2984.39,707.68 3038.53,653.54 5454.58,653.54 5488.19,687.15 5488.19,797.38 5504.78,813.98 5530.51,813.98 v1(5535.43,818.9)
USB3_SSTXN: C106.1 U22.17 | length 4222.2
  Top w5.91: C106.1@1744.09,588.58 1723.43,609.25 1723.43,759.7 1754.08,790.35 2373.03,790.35 v1(2377.95,785.43) ; U22.17@5461.02,838.19 5476.38,838.19 5481.5,843.31 5501.18,843.31 v1(5505.91,838.58)
  Bottom w5.91: v1(2377.95,785.43) 2382.87,790.35 2942.77,790.35 3057.93,675.2 5440.94,675.2 5464.57,698.82 5464.57,826.63 5481.44,843.5 5500.98,843.5 v1(5505.91,838.58)
USB3_SSTXP: C107.1 U22.18 | length 4238.5
  Top w5.91: C107.1@1692.91,588.58 1713.58,609.25 1713.58,763.78 1750,800.2 2373.03,800.2 v1(2377.95,805.12) ; U22.18@5461.02,857.87 5476.77,857.87 5481.5,853.15 5500.79,853.15 v1(5505.91,858.27)
  Bottom w5.91: v1(2377.95,805.12) 2382.87,800.2 2946.85,800.2 3062.01,685.04 5436.87,685.04 5454.72,702.9 5454.72,830.71 5477.36,853.35 5500.98,853.35 v1(5505.91,858.27)
USB4_DM: L8.2 R117.1 U17.5 | length 1643.9
  Top w3.94: L8.2@3878.93,587.6 3878.93,589.56 R117.1@3887.8,598.43
  Top w5.91: v1(3840.55,738.19) 3835.63,733.27 3835.63,594.63 3848.57,581.69 3873.02,581.69 L8.2@3878.93,587.6 ; v1(4692.91,1053.15) 4697.83,1048.23 4706.62,1048.23 4743.11,1084.72 4758.79,1100.39 4786.42,1100.39 4796.26,1090.55 4796.26,1077.76 4801.18,1072.83 U17.5@4801.18,1049.21
  Bottom w5.91: v1(3840.55,738.19) 3835.63,743.11 3835.63,759.7 3839.71,763.78 4720.47,763.78 4758.86,802.17 4758.86,1013.78 4724.41,1048.23 4697.83,1048.23 v1(4692.91,1053.15)
USB4_DP: L8.4 R122.1 U17.6 | length 1627.6
  Top w3.94: L8.4@3878.93,565.94 3878.93,563.98 R122.1@3887.8,555.12
  Top w5.91: v1(3820.87,738.19) 3825.79,733.27 3825.79,590.55 3844.49,571.85 3873.02,571.85 L8.4@3878.93,565.94 ; v1(4692.91,1033.46) 4697.83,1038.39 4710.7,1038.39 4762.87,1090.55 4782.34,1090.55 4786.42,1086.47 4786.42,1077.76 4781.5,1072.83 U17.6@4781.5,1049.21
  Bottom w5.91: v1(3820.87,738.19) 3825.79,743.11 3825.79,763.78 3835.63,773.62 4716.4,773.62 4749.02,806.24 4749.02,1009.7 4720.33,1038.39 4697.83,1038.39 v1(4692.91,1033.46)
USB_5V_IN: J24.94 J24.96 J24.98 R185.2 R222.2 | length 3586.5
  Top w3.94: J24.98@3430.51,3320.08 J24.98@3431.1,3319.49
  Top w19.68: v2(2474.41,3307.09) 2474.41,3122.05 2498.03,3098.43 2618.11,3098.43 2700.79,3015.75 R222.2@2700.79,2986.22
  Power w3.94: v1(3435.04,3269.68) 3444.88,3279.53 ; v1@4600.39,3188.98 v1(4600.39,3194.88) ; 4614.34,3188.98 4630.08,3204.72 v1(4635.83,3204.72) ; 4618.11,3188.98 v1(4618.11,3204.72)
  Power w19.68: v2(2474.41,3307.09) 2519.69,3352.36 2866.14,3352.36 3062.99,3155.51 3222.44,3155.51 3305.12,3238.19 3438.98,3238.19 3456.69,3255.91 v1(3456.69,3289.37)
  Power w39.37: 3444.88,3279.53 3444.88,3299.21 3470.47,3324.8 4059.06,3324.8 4210.63,3173.23 4574.8,3173.23 4590.55,3188.98 4600.39,3188.98 4614.34,3188.98 4618.11,3188.98
  Bottom w7.87: v1(4578.74,3175.2) 4578.74,3179.13 4574.8,3183.07 4590.55,3183.07
  Bottom w39.37: 4590.55,3183.07 4665.35,3183.07 4771.65,3076.77 v1(5127.95,3076.77)
  other v1: 5106.3,3057.09 5127.95,3057.09 5106.3,3076.77 5106.3,3096.46 5127.95,3096.46 4600.39,3175.2 4578.74,3194.88 3456.69,3269.68 3435.04,3289.37 3435.04,3356.3 3456.69,3356.3
USB_OTG0_DM: D19.2 L15.1 R92.2 U33.103 | length 3019.2
  Top w3.94: R92.2@4297.24,155.51 L15.1@4306.1,164.37
  Top w5.91: v1(3131.89,1751.97) 3136.81,1747.05 3149.54,1747.05 3221.46,1818.97 3221.46,2049.61 3217.52,2053.54 3207.68,2053.54 3204.72,2050.59 U33.103@3179.13,2050.59 ; v1(3842.52,1718.5) 3847.44,1713.58 3847.44,1690.94 3989.17,1549.21 3989.17,1190.59 4286.42,893.35 4286.42,559.06 4371.06,474.41 4371.06,303.15 4359.13,291.22 D19.2@4350.39,285.43 4371.06,264.76 4371.06,222.58 4361.08,212.6 4327.62,212.6 4312.01,196.99 4312.01,170.28 R92.2@4297.24,155.51
  Bottom w5.91: v1(3131.89,1751.97) 3136.81,1747.05 3779.67,1747.05 3829.86,1696.85 3842.38,1696.85 3847.44,1701.91 3847.44,1713.58 v1(3842.52,1718.5)
USB_OTG0_DP: D18.2 L15.3 R93.2 U33.105 | length 3068.3
  Top w3.94: L15.3@4327.76,164.37 R93.2@4336.61,155.51
  Top w5.91: v1(3131.89,1732.28) 3136.81,1737.2 3153.61,1737.2 3231.3,1814.89 3231.3,2054.13 3222.05,2063.39 3207.68,2063.39 3204.72,2066.34 U33.105@3179.13,2066.34 ; v1(3862.2,1718.5) 3857.28,1713.58 3857.28,1695.02 3999.02,1553.29 3999.02,1194.67 4296.26,897.42 4296.26,563.13 4380.91,478.49 4380.91,303.15 4392.84,291.22 D18.2@4401.57,285.43 4380.91,264.76 4380.91,218.5 4365.16,202.76 4331.69,202.76 4321.85,192.91 4321.85,170.28 R93.2@4336.61,155.51
  Bottom w5.91: v1(3131.89,1732.28) 3136.81,1737.2 3775.59,1737.2 3825.79,1687.01 3846.46,1687.01 3857.28,1697.83 3857.28,1713.58 v1(3862.2,1718.5)
USB_OTG0_ID: R95.2 R99.2 U33.101 | length 3198.2
  Top w3.94: v1(3179.13,2021.65) U33.101@3179.13,2034.84 ; v1(3844.49,2047.24) 3844.49,1811.02 4059.06,1596.46 4059.06,1202.76 4364.17,897.64 v1(4364.17,608.27) ; R99.2@4025.59,228.35 v1(4041.34,228.35) ; v1(4360.24,155.51) R95.2@4375.98,155.51
  Bottom w3.94: v1(3179.13,2021.65) 3190.94,2033.46 3582.68,2033.46 3596.46,2047.24 v1(3844.49,2047.24) ; v1(4041.34,228.35) 4041.34,244.09 4092.52,295.28 4301.18,295.28 ; v1(4360.24,155.51) 4305.12,210.63 4305.12,291.34 ; v1(4364.17,608.27) 4377.95,594.49 4377.95,527.56 4305.12,454.72 4305.12,299.21 ; 4301.18,295.28 4305.12,291.34 ; 4301.18,295.28 4305.12,295.28 ; 4301.18,295.28 4305.12,299.21 ; 4305.12,291.34 4305.12,295.28 ; 4305.12,295.28 4305.12,299.21
USB_OTG0_VBUSDET: J24.97 R98.2 | length 4037.7
  Top w3.94: J24.97@3430.51,3216.14 3430.51,3183.07 3411.42,3163.98 3411.42,2639.76 3417.32,2633.86 3437.01,2633.86 v1(3450.79,2647.64) ; v1(3856.3,2718.5) 3866.14,2708.66 3866.14,2537.4 3793.31,2464.57 3793.31,1832.68 4031.5,1594.49 4031.5,1204.72 4340.55,895.67 v1(4340.55,586.61) ; R98.2@4025.59,265.75 4025.59,268.87 4039.37,282.65 v1(4039.37,283.46)
  Bottom w3.94: v1(3450.79,2647.64) 3484.25,2647.64 3525.59,2688.98 3805.12,2688.98 3834.65,2718.5 v1(3856.3,2718.5) ; v1(4039.37,283.46) 4066.93,311.02 4283.46,311.02 4287.4,314.96 4287.4,474.41 4340.55,527.56 v1(4340.55,586.61)
USB_PWR_EN: Q9.3 R114.2 R120.2 | length 1412.4
  Top w3.94: v1(3163.39,15.75) R114.2@3163.39,594.49 ; R120.2@3899.61,15.75 v1(3917.32,15.75)
  Top w15.75: R120.2@3899.61,15.75 3915.35,31.5 Q9.3@3915.35,71.2
  Bottom w3.94: v1(3163.39,15.75) v1(3917.32,15.75)
USB_PWR_H: J24.10 U20.4 | length 5579.5
  Top w3.94: U20.4@1173.23,360.24 1173.23,562.79 1449.02,838.58 2454.72,838.58 2872.05,1255.91 2872.05,2197.74 2931.1,2256.79 v1(2931.1,2269.68) ; v1(3872.05,2444.88) 3872.05,2472.44 3915.35,2515.75 3915.35,2690.94 3980.31,2755.91 4108.33,2755.91 4289.37,2936.95 4289.37,3338.58 4277.56,3350.39 4129.33,3350.39 4123.43,3344.49 J24.10@4123.43,3320.08
  Bottom w3.94: v1(2931.1,2269.68) 3493.95,2269.68 3669.15,2444.88 v1(3872.05,2444.88)
VBUS: C86.1 J16.1 R100.2 R185.1 | length 3998.2
  Top w3.94: v1(4025.59,92.52) C86.1@4025.59,114.17 ; R100.2@4025.59,152.6 R100.2@4025.59,153.54
  Top w15.75: C86.1@4025.59,114.17 R100.2@4025.59,152.6
  Top w39.37: v1(4501.97,523.62) v1(4501.97,582.68) 4501.97,1222.44 4683.07,1403.54 4683.07,2797.24 4610.24,2870.08 4610.24,3019.68 4659.45,3068.9 R185.1@5029.53,3068.9
  Bottom w3.94: v1(4025.59,72.83) 4035.43,82.68
  Bottom w39.37: 4035.43,82.68 4358.27,82.68 4474.41,198.82 4474.41,484.25 4501.97,511.81 v1(4501.97,523.62) v1(4501.97,582.68)
  other v1: 4047.24,72.83 4047.24,92.52 4501.97,543.31 4501.97,562.99
VCC3V3_LCD0: C40.1 C41.1 C42.1 C46.1 C47.1 J11.18 J11.19 J11.20 J11.21 R40.2 U9.1 | length 164.2
  Top w15.75: R40.2@200.79,2698.82 v1(216.54,2698.82) ; C42.1@214.57,2551.18 214.57,2566.93 v1(216.54,2568.9)
  Bottom w15.75: v1(216.54,2568.9) v1(216.54,2698.82)
VCC3V3_PCIE: C12.1 C13.1 C14.1 C20.1 C21.1 C22.1 J6.A9 J6.A10 J6.B8 J6.B10 L1.2 R15.1 R21.2 R22.2 R23.2 R24.1 | length 2770.7
  Top w15.75: R15.1@5330.71,1521.65 C12.1@5291.34,1521.65 5275.59,1521.65 5261.81,1535.43 5261.81,1954.72 5261.81,1994.09 5293.31,2025.59 C20.1@5405.51,2025.59
  Top w19.68: R21.2@5582.68,1826.77 R22.2@5582.68,1864.17 R24.1@5582.68,1901.57 R23.2@5582.68,1938.98 C14.1@5582.68,1978.35 5582.68,2025.59
  Top w51.18: C20.1@5405.51,2025.59 5582.68,2025.59 C22.1@5612.2,2025.59 5673.23,2025.59 ; J6.A9@5812.2,1982.68 J6.A10@5733.46,2022.05 5729.92,2025.59 5673.23,2025.59 ; J6.B8@5989.37,1943.31 J6.B10@5989.37,2022.05 6045.28,2077.95 6045.28,2458.66 5937.01,2566.93 5728.35,2566.93 5673.23,2511.81 5673.23,2025.59
VCC3V3_SD_1: C4.1 C5.1 C7.1 C8.1 CN14A1.4 Q1.3 R220.2 | length 39.6
  Bottom w19.68: v2(4767.72,356.3) CN14A1.4@4767.72,395.89
  other v2: 4767.72,332.68